# Altium PCB 606-100863-r02.pcbdoc (part 1 of 2)
Units mm, origin at the board's own origin, x right, y up, seen from the top; angles counter-clockwise.
Board outline 84 x 22 mm, 2 copper layers (Top Layer, Bottom Layer), stack 1.471 mm thick; 42 components, 21 nets, 119 pads, 46 vias.
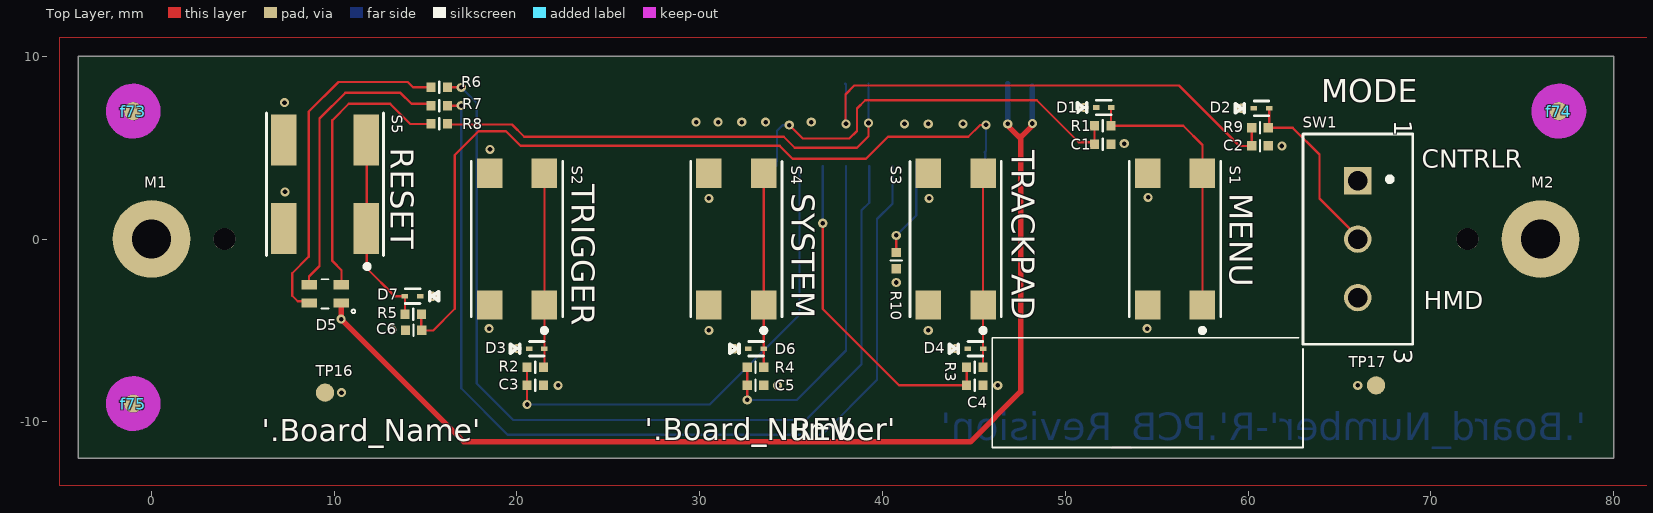
[diagram p0: Top Layer view]
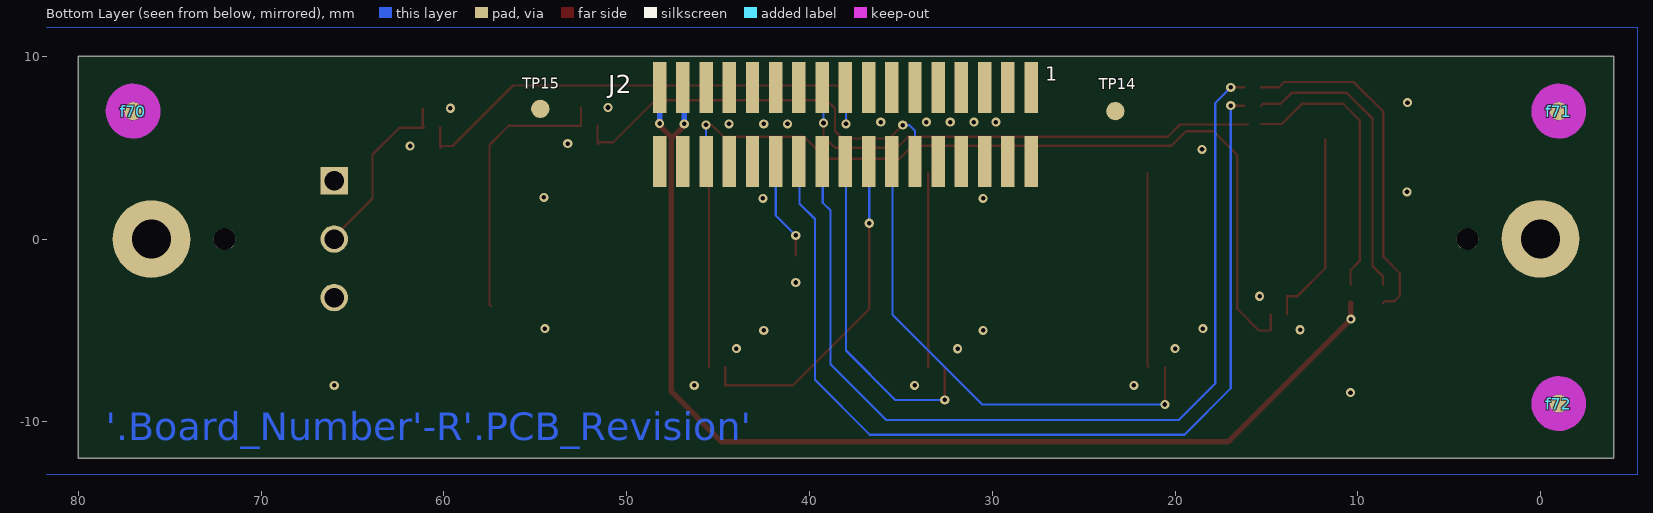
[diagram p1: Bottom Layer view, seen from below]

## Layer stack, top to bottom
Top Solder: solder mask 0.0102, Solder Resist, Dk 3.5
Top Layer: signal copper 0.0356
Dielectric 1: core 1.4, FR-4, Dk 4.2
Bottom Layer: signal copper 0.0356
Bottom Solder: solder mask 0.0102, Solder Resist, Dk 3.5

## Board outline
-4,-12 -4,10 80,10 80,-12

## Design rules (kind name [scope] priority, off if disabled: settings)
AssemblyTestPointUsage [All] p0: scope1count=1 scope1_0_kind=Board scope1_0_value=Board scope2count=1 scope2_0_kind=Board scope2_0_value=Board commentlength=0
AssemblyTestpoint [All] p0: scope1count=1 scope1_0_kind=Board scope1_0_value=Board scope2count=1 scope2_0_kind=Board scope2_0_value=Board commentlength=0
BoardOutlineClearance [All] p0: scope1count=1 scope1_0_kind=Board scope1_0_value=Board scope2count=1 scope2_0_kind=Board scope2_0_value=Board commentlength=0 gap=0.25
BoardOutlineClearance [All] p1: gap=0.25 except(0: Text-OutlineEdge)
Clearance [All] p0: scope1count=1 scope1_0_kind=Board scope1_0_value=Board scope2count=1 scope2_0_kind=Board scope2_0_value=Board commentlength=0 gap=0.125
Clearance [All] p1: gap=0.125
ComponentClearance [All] p0: scope1count=1 scope1_0_kind=Board scope1_0_value=Board scope2count=1 scope2_0_kind=Board scope2_0_value=Board commentlength=0 gap=0.18 collisioncheckmode=3
ComponentClearance [All] p1: gap=0.18 collisioncheckmode=3 verticalgap=0.18 showdistances=FALSE
DiffPairsRouting [All] p0: scope1count=1 scope1_0_kind=Board scope1_0_value=Board scope2count=1 scope2_0_kind=Board scope2_0_value=Board commentlength=0
FabricationTestPointUsage [All] p0: scope1count=1 scope1_0_kind=Board scope1_0_value=Board scope2count=1 scope2_0_kind=Board scope2_0_value=Board commentlength=0 valid=0 allowmultiple=FALSE
FabricationTestpoint [All] p0: scope1count=1 scope1_0_kind=Board scope1_0_value=Board scope2count=1 scope2_0_kind=Board scope2_0_value=Board commentlength=0 side=3 testpointundercomponent=TRUE minsize=1.016 maxsize=2.54 preferedsize=1.524 minholesize=0 maxholesize=1.016 preferedholesize=0.813 testpointgrid=0.025
FanoutControl Fanout_BGA [All] p0 off: scope1count=1 scope1_0_kind=Board scope1_0_value=Board scope2count=1 scope2_0_kind=Board scope2_0_value=Board commentlength=69 // Protel DXP Scope 1 Expression Was: IsBGA   Fanout_BGA (Default Rule)
FanoutControl Fanout_LCC [All] p0 off: scope1count=1 scope1_0_kind=Board scope1_0_value=Board scope2count=1 scope2_0_kind=Board scope2_0_value=Board commentlength=69 // Protel DXP Scope 1 Expression Was: IsLCC   Fanout_LCC (Default Rule)
FanoutControl Fanout_SOIC [All] p0 off: scope1count=1 scope1_0_kind=Board scope1_0_value=Board scope2count=1 scope2_0_kind=Board scope2_0_value=Board commentlength=71 // Protel DXP Scope 1 Expression Was: IsSOIC   Fanout_SOIC (Default Rule)
FanoutControl Fanout_Small [All] p0 off: scope1count=1 scope1_0_kind=Board scope1_0_value=Board scope2count=1 scope2_0_kind=Board scope2_0_value=Board commentlength=84 // Protel DXP Scope 1 Expression Was: (CompPinCount < 5)   Fanout_Small (Default Rule)
FanoutControl Fanout_Default [All] p0: scope1count=1 scope1_0_kind=Board scope1_0_value=Board scope2count=1 scope2_0_kind=Board scope2_0_value=Board commentlength=30 // Fanout_Default (Default Rule)
Height [All] p0: scope1count=1 scope1_0_kind=Board scope1_0_value=Board scope2count=1 scope2_0_kind=Board scope2_0_value=Board commentlength=0
HoleSize [All] p0: scope1count=1 scope1_0_kind=Board scope1_0_value=Board scope2count=1 scope2_0_kind=Board scope2_0_value=Board commentlength=0 absolutevalues=TRUE maxlimit=2.7 minlimit=0.025 maxpercent=80.000 minpercent=20.000
HoleSize [All] p1: absolutevalues=TRUE maxlimit=2.7 minlimit=0.025 maxpercent=80.000 minpercent=20.000
HoleToHoleClearance [All] p0: scope1count=1 scope1_0_kind=Board scope1_0_value=Board scope2count=1 scope2_0_kind=Board scope2_0_value=Board commentlength=0
LayerPairs [All] p0: scope1count=1 scope1_0_kind=Board scope1_0_value=Board scope2count=1 scope2_0_kind=Board scope2_0_value=Board commentlength=0 enforce=TRUE
MinimumSolderMaskSliver [All] p0: scope1count=1 scope1_0_kind=Board scope1_0_value=Board scope2count=1 scope2_0_kind=Board scope2_0_value=Board commentlength=0
MinimumSolderMaskSliver MinimumSolderMaskSliver_1 [All] p0 off: scope1count=1 scope1_0_kind=Board scope1_0_value=Board scope2count=1 scope2_0_kind=Board scope2_0_value=Board commentlength=44 // Protel DXP Scope 2 Expression Was: IsPad
MinimumSolderMaskSliver MinimumSolderMaskSliver_1 [isvia vs IsPad] p1: minsoldermaskwidth=0
MinimumSolderMaskSliver [All] p2: minsoldermaskwidth=0.05
NetAntennae [All] p0: scope1count=1 scope1_0_kind=Board scope1_0_value=Board scope2count=1 scope2_0_kind=Board scope2_0_value=Board commentlength=0
PasteMaskExpansion [All] p0: scope1count=1 scope1_0_kind=Board scope1_0_value=Board scope2count=1 scope2_0_kind=Board scope2_0_value=Board commentlength=0 expansion=0
PlaneClearance [All] p0: scope1count=1 scope1_0_kind=Board scope1_0_value=Board scope2count=1 scope2_0_kind=Board scope2_0_value=Board commentlength=0 clearance=0.2
PlaneClearance [All] p1: clearance=0.2
PlaneConnect [All] p0: scope1count=1 scope1_0_kind=Board scope1_0_value=Board scope2count=1 scope2_0_kind=Board scope2_0_value=Board commentlength=0 planeconnectstyle=Direct reliefexpansion=0.508 reliefentries=4 reliefconductorwidth=0.254 reliefairgap=0.254
PlaneConnect [All] p1: planeconnectstyle=Direct reliefexpansion=0.508 reliefentries=4 reliefconductorwidth=0.254 reliefairgap=0.254
PolygonConnect POLY_VIA [All] p0 off: scope1count=1 scope1_0_kind=Board scope1_0_value=Board scope2count=1 scope2_0_kind=Board scope2_0_value=Board commentlength=48 connectstyle=Direct reliefconductorwidth=0.254 reliefentries=4 polygonreliefangle="90 Angle" // Protel DXP Scope 2 Expression Was: IsPolygon
PolygonConnect MTG [All] p0: scope1count=1 scope1_0_kind=PadClass scope1_0_value=Thick_Thermal scope2count=1 scope2_0_kind=Board scope2_0_value=Board commentlength=0 connectstyle=Relief reliefconductorwidth=0.4 reliefentries=4 polygonreliefangle="90 Angle"
PolygonConnect PolygonConnect_1 [All] p0: scope1count=1 scope1_0_kind=Board scope1_0_value=Board scope2count=1 scope2_0_kind=Board scope2_0_value=Board commentlength=0 connectstyle=Relief reliefconductorwidth=0.25 reliefentries=4 polygonreliefangle="90 Angle"
PolygonConnect MTG [InPadClass('Thick_Thermal')] p1: connectstyle=Relief reliefconductorwidth=0.4 reliefentries=4 polygonreliefangle="90 Angle" airgapwidth=0.125
PolygonConnect POLY_VIA [IsVia vs IsPolygon] p2: connectstyle=Direct reliefconductorwidth=0.254 reliefentries=4 polygonreliefangle="90 Angle" airgapwidth=0.254
PolygonConnect PolygonConnect_1 [All] p3: connectstyle=Relief reliefconductorwidth=0.25 reliefentries=4 polygonreliefangle="90 Angle" airgapwidth=0.125
RoomDefinition HMD_Button [All] p0: scope1count=1 scope1_0_kind=ComponentClass scope1_0_value=HMD_Button scope2count=1 scope2_0_kind=Board scope2_0_value=Board commentlength=0 region_x1=152558709 region_y1=56930451 region_x2=185439112 region_y2=65590417 confinementstyle=ConfineIn
RoomDefinition HMD_Button [InComponentClass('HMD_Button')] p1: confinementstyle=ConfineIn formatcopy=TRUE lockcomponents=FALSE outline -3.835,-12.067 79.681,-12.067 79.681,9.929 -3.835,9.929
RoutingCorners [All] p0: scope1count=1 scope1_0_kind=Board scope1_0_value=Board scope2count=1 scope2_0_kind=Board scope2_0_value=Board commentlength=0 cornerstyle=45-Degree minsetback=2.54 maxsetback=2.54
RoutingLayers [All] p0: scope1count=1 scope1_0_kind=Board scope1_0_value=Board scope2count=1 scope2_0_kind=Board scope2_0_value=Board commentlength=0 top layer=Automatic bottom layer=Automatic
RoutingPriority [All] p0: scope1count=1 scope1_0_kind=Board scope1_0_value=Board scope2count=1 scope2_0_kind=Board scope2_0_value=Board commentlength=0
RoutingTopology [All] p0: scope1count=1 scope1_0_kind=Board scope1_0_value=Board scope2count=1 scope2_0_kind=Board scope2_0_value=Board commentlength=0 topology=Shortest
RoutingVias [All] p0: scope1count=1 scope1_0_kind=Board scope1_0_value=Board scope2count=1 scope2_0_kind=Board scope2_0_value=Board commentlength=0 holewidth=0.25 width=0.5 viastyle="Through Hole" minholewidth=0.25 minwidth=0.5 maxholewidth=0.25 maxwidth=0.5
RoutingVias [All] p1: holewidth=0.25 width=0.5 viastyle="Through Hole" minholewidth=0.25 minwidth=0.5 maxholewidth=0.25 maxwidth=0.5
ShortCircuit [All] p0: scope1count=1 scope1_0_kind=Board scope1_0_value=Board scope2count=1 scope2_0_kind=Board scope2_0_value=Board commentlength=0 allowed=FALSE
SilkToBoardRegionClearance [All] p0: scope1count=1 scope1_0_kind=Board scope1_0_value=Board scope2count=1 scope2_0_kind=Board scope2_0_value=Board commentlength=0
SilkToSilkClearance [All] p0 off: scope1count=1 scope1_0_kind=Board scope1_0_value=Board scope2count=1 scope2_0_kind=Board scope2_0_value=Board commentlength=0
SilkToSilkClearance [All] p1 off: silktosilkclearance=0.05
SilkToSolderMaskClearance [All] p0 off: scope1count=1 scope1_0_kind=Board scope1_0_value=Board scope2count=1 scope2_0_kind=Board scope2_0_value=Board commentlength=44 // Protel DXP Scope 1 Expression Was: IsPad
SilkToSolderMaskClearance [IsPad] p1: minsilkscreentomaskgap=0.125 clearancetoexposedcopper=TRUE
SolderMaskExpansion [All] p0: scope1count=1 scope1_0_kind=Board scope1_0_value=Board scope2count=1 scope2_0_kind=Board scope2_0_value=Board commentlength=0 expansion=0.05
SolderMaskExpansion [All] p1: expansion=0.05
UnRoutedNet [All] p0: scope1count=1 scope1_0_kind=Board scope1_0_value=Board scope2count=1 scope2_0_kind=Board scope2_0_value=Board commentlength=0
UnpouredPolygon [All] p0: scope1count=1 scope1_0_kind=Board scope1_0_value=Board scope2count=1 scope2_0_kind=Board scope2_0_value=Board commentlength=0
Width [All] p0: scope1count=1 scope1_0_kind=Board scope1_0_value=Board scope2count=1 scope2_0_kind=Board scope2_0_value=Board commentlength=0 maxlimit=0.5 minlimit=0.125 preferedwidth=0.125
Width PWR_GND [All] p0: scope1count=1 scope1_0_kind=NetClass scope1_0_value=PWR_GND scope2count=1 scope2_0_kind=Board scope2_0_value=Board commentlength=0 maxlimit=0.25 minlimit=0.25 preferedwidth=0.25
Width CRITICAL [All] p0: scope1count=1 scope1_0_kind=NetClass scope1_0_value=MOTOR_DRIVERS scope2count=1 scope2_0_kind=Board scope2_0_value=Board commentlength=0 maxlimit=0.4 minlimit=0.3 preferedwidth=0.4
Width PWR_GND [InNetClass('PWR_GND')] p1: maxlimit=0.25 minlimit=0.25 preferedwidth=0.25
Width CRITICAL [InNetClass('MOTOR_DRIVERS')] p2: maxlimit=0.4 minlimit=0.3 preferedwidth=0.4
Width [All] p3: maxlimit=0.5 minlimit=0.125 preferedwidth=0.125
23 further rules are at their usual default settings.

## Classes and differential pairs
pad class Thick_Thermal: M1-1 M2-1 SW1-1
component class HMD_Button: C1 C2 C3 C4 C5 C6 D1 D2 D3 D4 D5 D6 D7 J2 M1 M2 R1 R2 R3 R4 R5 R6 R7 R8 R9 R10 S1 S2 S3 S4 S5 SW1 TP14 TP15 TP16 TP17
net class PWR_GND: GND

## Components (designator, comment, footprint, x,y, rotation, side; value= is the part's Value field where it differs from the comment)
C1 "0.1uF" 0402-IPCsm_55 52.05,5.2 r0 top
C2 "0.1uF" 0402-IPCsm_55 60.65,5.095 r0 top
C3 "0.1uF" 0402-IPCsm_55 21,-8 r0 top
C4 "0.1uF" 0402-IPCsm_55 45.05,-8 r0 top
C5 "0.1uF" 0402-IPCsm_55 33.05,-8 r0 top
C6 "0.1uF" 0402-IPCsm_55 14.343,-4.995 r180 top
D1 "ESD9R3.3ST5G" sod923-40 52.1,7.2 r180 top
D2 "ESD9R3.3ST5G" sod923-40 60.73,7.15 r180 top
D3 "ESD9R3.3ST5G" sod923-40 21.08,-6 r180 top
D4 "ESD9R3.3ST5G" sod923-40 45.08,-6 r180 top
D5 "APTF1616SEEZGQBDC" led_RBG_1p6x1p6_sm 9.5,-3 r0 top locked
D6 "ESD9R3.3ST5G" sod923-40 33.08,-6 r180 top
D7 "ESD9R3.3ST5G" sod923-40 14.288,-3.12 r0 top
f70 "Comment" Fiducial_c100opening300 77,7 r180 bottom
f71 "Comment" Fiducial_c100opening300 -1,7 r180 bottom
f72 "Comment" Fiducial_c100opening300 -1,-9 r180 bottom
f73 "Comment" Fiducial_c100opening300 -1,7 r0 top
f74 "Comment" Fiducial_c100opening300 77,7 r0 top
f75 "Comment" Fiducial_c100opening300 -1,-9 r0 top
J2 "FTSH-117-01-F-DV-K" FTSH-117-01-XXX-DV-K 38.035,6.268 r0 bottom
M1 "MTGC425H215P" MTGC425H215P 0,0 r0 top
M2 "MTGC425H215P" MTGC425H215P 75.993,-0.011 r0 top
R1 "100" 0402-IPCsm_40 52.05,6.2 r0 top
R2 "100" 0402-IPCsm_40 21,-7 r0 top
R3 "100" 0402-IPCsm_40 45.05,-7 r0 top
R4 "100" 0402-IPCsm_40 33.05,-7 r0 top
R5 "100" 0402-IPCsm_40 14.318,-4.12 r180 top
R6 "240" 0402-IPCsm_40 15.75,8.3 r180 top
R7 "124" 0402-IPCsm_40 15.75,7.3 r180 top
R8 "124" 0402-IPCsm_40 15.75,6.3 r180 top
R9 "100" 0402-IPCsm_40 60.65,6.095 r0 top
R10 "0" 0402-IPCsm_40 40.75,-1.175 r90 top
S1 "TL3305AF260QG" SW_TL3305_G 56,0 r90 top
S2 "TL3305AF260QG" SW_TL3305_G 20,0 r90 top
S3 "TL3305AF260QG" SW_TL3305_G 44,0 r90 top
S4 "TL3305AF260QG" SW_TL3305_G 32,0 r90 top
S5 "TL3301EF160QJ" SW_TL3301_J 9.5,3 r90 top
SW1 "1825115-1" SW_3_TE_1825115 66,0 r270 top
TP14 "tp-1mm" TP-S100_SMT 23.263,7 r90 bottom
TP15 "tp-1mm" TP-S100_SMT 54.725,7.125 r90 bottom
TP16 "tp-1mm" TP-S100_SMT 9.5,-8.4 r90 top
TP17 "tp-1mm" TP-S100_SMT 67,-8 r90 top

## Footprints (in the part's own frame and the unit in brackets; to place one, negate y for a bottom-side part, rotate by r counter-clockwise, add the part's x,y. Pads: shape width x height; smd on the part's side, far side on the other; paste and mask are expansions set on the pad)
0402-IPCsm_40 [mm] "0402-IPCSM_40"
  rect 0.5x0.52 smd mask+0: 1(-0.45,0) 2(0.45,0)
  silkscreen extent 0,-0.3 0,0.3
0402-IPCsm_55 [mm] "0402-IPCSM_55"
  rect 0.5x0.52 smd mask+0: 1(-0.45,0) 2(0.45,0)
  silkscreen extent 0,-0.3 0,0.3
Fiducial_c100opening300 [mm]
  round 1 smd paste-10 mask+0: 0(0,0)
  Top Layer keep-out circle w1: c0,0 r1
FTSH-117-01-XXX-DV-K [mil]
  rect 29x110 smd mask+0: 1(-400,-80) 2(-400,80) 3(-350,-80) 4(-350,80) 5(-300,-80) 6(-300,80) 7(-250,-80) 8(-250,80) 9(-200,-80) 10(-200,80) 11(-150,-80) 12(-150,80) 13(-100,-80) 14(-100,80) 15(-50,-80) 16(-50,80) 17(0,-80) 18(0,80) 19(50,-80) 20(50,80) 21(100,-80) 22(100,80) 23(150,-80) 24(150,80) 25(200,-80) 26(200,80) 27(250,-80) 28(250,80) 29(300,-80) 30(300,80) 31(350,-80) 32(350,80) 33(400,-80) 34(400,80)
led_RBG_1p6x1p6_sm [mm] "led_RBG_1p6x1p6_sm"
  rect 0.85x0.5 smd: 1(0.875,-0.5) 2(-0.875,-0.5) 3(-0.875,0.5) 4(0.875,0.5)
  silkscreen extent -0.2,-1.05 1.65,0.8
MTGC425H215P [mm] "MTGC425H215P"
  round 4.25 hole 2.15: 1(0.007,0.011)
sod923-40 [mm] "SOD923 .4mm High"
  rect 0.36x0.25 smd mask+0: A(0.42,0) C(-0.42,0)
  silkscreen extent -0.4,-0.4 1.44,0.4
SW_3_TE_1825115 [mm] "SWITCH SLIDE SPDT 250MA 125V"
  rect 1.5x1.5 hole 1.07: 1(-3.2,0)
  round 1.5 hole 1.07: 2(0,0) 3(3.2,0)
  silkscreen extent -5.75,-3 5.75,3
SW_TL3301_J [mm] "SWITCH TACTILE SPST-NO 0.05A 12V"
  rect 2.795x1.4 smd mask+0: 1(-2.412,-2.25) 2(2.412,-2.25) 3(-2.412,2.25) 4(2.412,2.25)
  silkscreen extent -4.62,-3.2 3.9,3.2
SW_TL3305_G [mm] "SWITCH TACTILE SPST-NO 50MA 12V"
  rect 1.6x1.4 smd mask+0: 1(-3.6,-1.5) 2(3.6,-1.5) 3(-3.6,1.5) 4(3.6,1.5)
  silkscreen extent -5.12,-2.5 4.25,2.5
TP-S100_SMT [mm] "TP-S100_SMT"
  round 1 smd paste-0.5: 1(0,0)

## Part data
C1 C2 C3 C4 C5 C6: library part GRM155R71C104KA88D, "CAP CER .1UF 16V X7R 0402"
D1 D2 D3 D4 D6 D7: "TVS DIODE 3.3VWM 7.8VC SOD923"
D5: "LED RGB CLEAR 0606 SMD"
J2: library part FTSH-117-01-f-DV-k, "34 Positions Header, Shrouded Connector 0.050\" (1.27mm) Surface Mount Gold"
M1 M2: "MTG, 4.25mm PAD, 2.15mm Plated Hole"
R1 R2 R3 R4 R5 R9: library part MCR01MZPJ101, "RES 100 OHM 5% 0402 SMD"
R6: library part ERJ-2RKF2400X, "RES 240 OHM 1/10W 1% 0402 SMD"
R7 R8: library part RC0402FR-07124RL, "RES SMD 124 OHM 1% 1/16W 0402"
R10: library part ERJ-2GE0R00X, "RES 0.0 OHM 1/10W JUMP 0402 SMD"
S1 S2 S3 S4: "SWITCH TACTILE SPST-NO 50MA 12V"
S5: "SWITCH TACTILE SPST-NO 0.05A 12V"
SW1: "SWITCH SLIDE SPDT 250MA 125V"
TP14 TP15 TP16 TP17: library part TP0042, "TESTPOINT, 1MM SMD, Square pad, Round SM opening"

## Free pads (board coordinates)
  round 1.2 hole 1.2 unplated: 0(4,0) 0(72,0)

## Via types
v1: diameter 0.5, hole 0.25, Top Layer to Bottom Layer, tented both sides, 46 vias

## Nets (pads, with @x,y where several pads share a name; then routed paths per layer and width w, separated by ;. In a path a pad name is that pad's centre, name@x,y a point inside that pad or via, vN(x,y) a via of type N, cw(c..) or ccw(c..) an arc to the next point about the centre after c; other vN are vias at no path point)
BTN_MENU: C1.1 J2.12 R1.1 | length 23.3
  Top Layer w0.125: v1(34.893,6.236) 35.63,5.5 38.18,5.5 38.6,5.92 38.6,7.15 39.05,7.6 48.43,7.6 50.73,5.3 51.5,5.3 C1.1@51.6,5.2 R1.1@51.6,6.2
  Bottom Layer w0.125: J2.12@34.19,4 J2.12@34.19,4.261 ; J2.12@34.224,4.261 34.224,5.924 34.536,6.236 v1(34.893,6.236)
BTN_SYS: C5.1 J2.18 R4.1 | length 18.4
  Top Layer w0.125: v1(32.6,-8.8) C5.1@32.6,-8 R4.1@32.6,-7
  Bottom Layer w0.125: v1(32.6,-8.8) 35.3,-8.8 38,-6.1 J2.18@38,4
BTN_TRACK: C4.1 J2.16 R3.1 | length 18.4
  Top Layer w0.125: v1(36.73,0.87) 36.73,-3.83 40.9,-8 C4.1@44.6,-8 R3.1@44.6,-7
  Bottom Layer w0.125: v1(36.73,0.87) J2.16@36.73,4
BTN_TRIG: C3.1 J2.14 R2.1 | length 27.1
  Top Layer w0.125: v1(20.55,-9.05) C3.1@20.55,-8 R2.1@20.55,-7
  Bottom Layer w0.125: v1(20.55,-9.05) 30.55,-9.05 35.46,-4.14 J2.14@35.46,4
GND: C1.2 C2.2 C3.2 C4.2 C5.2 C6.2 D1.A D2.A D3.A D4.A D6.A D7.A J2.3 J2.5 J2.7 J2.9 J2.11 J2.13 J2.15 J2.21 J2.23 J2.25 J2.29 M1.1 M2.1 R10.1 S1.3 S1.4 S2.3 S2.4 S3.3 S3.4 S4.3 S4.4 S5.3 S5.4 SW1.1 TP14.1 TP15.1 TP16.1 TP17.1
  other v1: 10.4,-8.4 22.25,-8 34.25,-8 46.3,-8 66,-8 19.995,-5.995 31.89,-6 43.995,-5.995 30.5,-4.995 42.5,-4.995 13.159,-4.96 18.475,-4.9 54.475,-4.9 15.373,-3.125 40.75,-2.375 30.5,2.23 42.55,2.23 54.525,2.28 7.306,2.58 18.525,4.905 61.845,5.095 53.225,5.225 41.2,6.3 42.5,6.3 44.4,6.3 29.8,6.4 31,6.4 32.3,6.4 33.6,6.4 36.1,6.4 59.645,7.155 51.02,7.2 7.281,7.469
MASTER_NRST: C6.1 J2.30 R5.1 | length 44.9
  Top Layer w0.125: R5.1@14.768,-4.12 14.768,-4.97 C6.1@14.793,-4.995 15.422,-4.995 16.6,-3.817 16.6,4.6 17.9,5.9 19.4,5.9 20.2,5.1 34.371,5.1 35.071,4.4 39.1,4.4 40.3,5.6 44.694,5.6 45.339,6.245 v1(45.661,6.245)
  Bottom Layer w0.125: J2.30@45.58,4.75 45.661,4.831 v1(45.661,6.245) ; J2.30@45.62,4 J2.30@45.62,4.75
MCU_LED_B: J2.19 R8.1 | length 26.9
  Top Layer w0.125: R8.1@16.021,6.275 R8.1@16.2,6.275 ; R8.1@16.2,6.3 R8.1@16.2,6.275 ; v1(39.23,6.35) 39.23,5.63 38.6,5 35.2,5 34.6,5.6 20.4,5.6 19.725,6.275 R8.1@16.2,6.275
  Bottom Layer w0.125: v1(39.23,6.35) J2.19@39.23,8.5
MCU_LED_G: J2.22 R7.1 | length 53.4
  Top Layer w0.125: R7.1@16.2,7.3 v1(16.95,7.3) v1@17.08,7.3
  Bottom Layer w0.125: v1(16.95,7.3) 16.95,-8.166 19.484,-10.7 36.7,-10.7 39.7,-7.7 39.7,1.1 40.54,1.94 J2.22@40.54,4
MCU_LED_R: J2.20 R6.1 | length 51.6
  Top Layer w0.125: R6.1@16.2,8.3 v1(16.95,8.3) v1@17.08,8.3
  Bottom Layer w0.125: v1(16.95,8.3) 17.8,7.45 17.8,-7.9 19.8,-9.9 35.8,-9.9 38.85,-6.85 38.85,1.575 39.27,1.995 J2.20@39.27,4
NCONTR_MODE: C2.1 J2.17 R9.1 | length 28.8
  Top Layer w0.125: v1(38,6.3) 37.97,6.33 37.97,7.915 38.455,8.4 56.225,8.4 59.53,5.095 C2.1@60.105,5.095 ; C2.1@60.2,5 C2.1@60.105,5.095 ; R9.1@60.2,6.095 C2.1@60.2,5.095 C2.1@60.105,5.095
  Bottom Layer w0.125: J2.17@37.96,8.5 38,8.46 v1(38,6.3)
NetD1_C: D1.C R1.2 S1.1 S1.2 | length 15.3
  Top Layer w0.125: D1.C@52.52,7.2 52.5,7.18 R1.2@52.5,6.2 56.45,6.2 57.5,5.15 S1.2@57.5,3.6 S1.1@57.5,-3.6 S1.1@57.42,-3.68
NetD2_C: D2.C R9.2 SW1.2 | length 10.4
  Top Layer w0.125: D2.C@61.15,7.15 61.15,6.145 R9.2@61.1,6.095 62.434,6.095 63.9,4.63 63.9,2.225 66.125,0 SW1.2@66.5,0
NetD3_C: D3.C R2.2 S2.1 S2.2 | length 10.6
  Top Layer w0.125: R2.2@21.45,-7 21.5,-6.95 D3.C@21.5,-6 S2.1@21.5,-3.6 S2.2@21.5,3.6
NetD4_C: D4.C R3.2 S3.1 S3.2 | length 10.6
  Top Layer w0.125: R3.2@45.5,-7 D4.C@45.5,-6 S3.1@45.5,-3.6 S3.2@45.5,3.6
NetD5_2: D5.2 R6.2 | length 19
  Top Layer w0.125: D5.2@8.625,-3.5 8.525,-3.4 8,-3.4 7.7,-3.1 7.7,-1.87 8.6,-0.97 8.6,6.97 10.23,8.6 14.03,8.6 14.33,8.3 R6.2@15.3,8.3
NetD5_3: D5.3 R7.2 | length 16.3
  Top Layer w0.125: D5.3@8.625,-2.5 8.625,-2.045 9.2,-1.47 9.2,6.6 10.6,8 13.63,8 14.23,7.4 15.2,7.4 R7.2@15.3,7.3
NetD5_4: D5.4 R8.2 | length 15.4
  Top Layer w0.125: D5.4@10.375,-2.5 10.4,-2.475 10.4,-1.7 9.9,-1.2 9.9,6.5 10.8,7.4 13.059,7.4 14.159,6.3 R8.2@15.3,6.3
NetD6_C: D6.C R4.2 S4.1 S4.2 | length 10.6
  Top Layer w0.125: R4.2@33.5,-7 D6.C@33.5,-6 S4.1@33.5,-3.6 S4.2@33.5,3.6
NetD7_C: D7.C R5.2 S5.1 S5.2 | length 10.7
  Top Layer w0.125: S5.2@11.781,5.433 11.781,-1.601 13.3,-3.12 D7.C@13.868,-3.12 R5.2@13.868,-4.12
NetJ2_24: J2.24 R10.2 | length 5.6
  Top Layer w0.125: R10.2@40.75,-0.9 R10.2@40.75,-0.725 v1(40.75,0.2)
  Bottom Layer w0.125: v1(40.75,0.2) 41.845,1.295 J2.24@41.845,4.236
VCC_3V3_APP: D5.1 J2.31 J2.33 | length 62.3
  Top Layer w0.3: D5.1@10.375,-3.5 v1(10.375,-4.375) 17.1,-11.1 44.8,-11.1 47.55,-8.35 47.55,5.568 ; v1(46.85,6.3) 46.85,6.2 47.516,5.534 47.55,5.568 ; 47.55,5.618 47.55,5.568 ; v1(48.2,6.325) 48.2,6.218 47.55,5.568
  Bottom Layer w0.3: v1(46.85,6.3) J2.31@46.85,8.5 ; v1(48.2,6.325) J2.33@48.2,8.37
pads on no net: f70.0 f71.0 f72.0 f73.0 f74.0 f75.0 J2.1 J2.2 J2.4 J2.6 J2.8 J2.10 J2.26 J2.27 J2.28 J2.32 J2.34 SW1.3

## Polygon pours and split planes (outlines as drawn)
no net on FAB_DWG (solid): -237.468,17.483 ccw(c-237.968,17.483) -237.968,17.983 ccw(c-237.968,17.483) -238.468,17.483 ccw(c-237.968,17.483) -237.968,16.983 ccw(c-237.968,17.483) -237.468,17.483
no net on FAB_DWG (solid): -237.468,-6.517 ccw(c-237.968,-6.517) -237.968,-6.017 ccw(c-237.968,-6.517) -238.468,-6.517 ccw(c-237.968,-6.517) -237.968,-7.017 ccw(c-237.968,-6.517) -237.468,-6.517
no net on FAB_DWG (solid): -241.468,17.483 ccw(c-241.968,17.483) -241.968,17.983 ccw(c-241.968,17.483) -242.468,17.483 ccw(c-241.968,17.483) -241.968,16.983 ccw(c-241.968,17.483) -241.468,17.483
no net on FAB_DWG (solid): -243.468,17.483 ccw(c-243.968,17.483) -243.968,17.983 ccw(c-243.968,17.483) -244.468,17.483 ccw(c-243.968,17.483) -243.968,16.983 ccw(c-243.968,17.483) -243.468,17.483
no net on FAB_DWG (solid): -245.468,17.483 ccw(c-245.968,17.483) -245.968,17.983 ccw(c-245.968,17.483) -246.468,17.483 ccw(c-245.968,17.483) -245.968,16.983 ccw(c-245.968,17.483) -245.468,17.483
no net on FAB_DWG (solid): -239.468,17.483 ccw(c-239.968,17.483) -239.968,17.983 ccw(c-239.968,17.483) -240.468,17.483 ccw(c-239.968,17.483) -239.968,16.983 ccw(c-239.968,17.483) -239.468,17.483
no net on FAB_DWG (solid): -241.468,-6.517 ccw(c-241.968,-6.517) -241.968,-6.017 ccw(c-241.968,-6.517) -242.468,-6.517 ccw(c-241.968,-6.517) -241.968,-7.017 ccw(c-241.968,-6.517) -241.468,-6.517
no net on FAB_DWG (solid): -243.468,-6.517 ccw(c-243.968,-6.517) -243.968,-6.017 ccw(c-243.968,-6.517) -244.468,-6.517 ccw(c-243.968,-6.517) -243.968,-7.017 ccw(c-243.968,-6.517) -243.468,-6.517
no net on FAB_DWG (solid): -245.468,-6.517 ccw(c-245.968,-6.517) -245.968,-6.017 ccw(c-245.968,-6.517) -246.468,-6.517 ccw(c-245.968,-6.517) -245.968,-7.017 ccw(c-245.968,-6.517) -245.468,-6.517
no net on FAB_DWG (solid): -239.468,-6.517 ccw(c-239.968,-6.517) -239.968,-6.017 ccw(c-239.968,-6.517) -240.468,-6.517 ccw(c-239.968,-6.517) -239.968,-7.017 ccw(c-239.968,-6.517) -239.468,-6.517
no net on FAB_DWG (solid): -249.468,17.483 ccw(c-249.968,17.483) -249.968,17.983 ccw(c-249.968,17.483) -250.468,17.483 ccw(c-249.968,17.483) -249.968,16.983 ccw(c-249.968,17.483) -249.468,17.483
no net on FAB_DWG (solid): -247.468,17.483 ccw(c-247.968,17.483) -247.968,17.983 ccw(c-247.968,17.483) -248.468,17.483 ccw(c-247.968,17.483) -247.968,16.983 ccw(c-247.968,17.483) -247.468,17.483
no net on FAB_DWG (solid): -253.468,17.483 ccw(c-253.968,17.483) -253.968,17.983 ccw(c-253.968,17.483) -254.468,17.483 ccw(c-253.968,17.483) -253.968,16.983 ccw(c-253.968,17.483) -253.468,17.483
no net on FAB_DWG (solid): -251.468,17.483 ccw(c-251.968,17.483) -251.968,17.983 ccw(c-251.968,17.483) -252.468,17.483 ccw(c-251.968,17.483) -251.968,16.983 ccw(c-251.968,17.483) -251.468,17.483
no net on FAB_DWG (solid): -249.468,-6.517 ccw(c-249.968,-6.517) -249.968,-6.017 ccw(c-249.968,-6.517) -250.468,-6.517 ccw(c-249.968,-6.517) -249.968,-7.017 ccw(c-249.968,-6.517) -249.468,-6.517
no net on FAB_DWG (solid): -247.468,-6.517 ccw(c-247.968,-6.517) -247.968,-6.017 ccw(c-247.968,-6.517) -248.468,-6.517 ccw(c-247.968,-6.517) -247.968,-7.017 ccw(c-247.968,-6.517) -247.468,-6.517
no net on FAB_DWG (solid): -251.468,-6.517 ccw(c-251.968,-6.517) -251.968,-6.017 ccw(c-251.968,-6.517) -252.468,-6.517 ccw(c-251.968,-6.517) -251.968,-7.017 ccw(c-251.968,-6.517) -251.468,-6.517
no net on FAB_DWG (solid): -253.468,-6.517 ccw(c-253.968,-6.517) -253.968,-6.017 ccw(c-253.968,-6.517) -254.468,-6.517 ccw(c-253.968,-6.517) -253.968,-7.017 ccw(c-253.968,-6.517) -253.468,-6.517
no net on FAB_DWG (solid): -255.468,17.483 ccw(c-255.968,17.483) -255.968,17.983 ccw(c-255.968,17.483) -256.468,17.483 ccw(c-255.968,17.483) -255.968,16.983 ccw(c-255.968,17.483) -255.468,17.483
no net on FAB_DWG (solid): -257.468,17.483 ccw(c-257.968,17.483) -257.968,17.983 ccw(c-257.968,17.483) -258.468,17.483 ccw(c-257.968,17.483) -257.968,16.983 ccw(c-257.968,17.483) -257.468,17.483
no net on FAB_DWG (solid): -261.468,17.483 ccw(c-261.968,17.483) -261.968,17.983 ccw(c-261.968,17.483) -262.468,17.483 ccw(c-261.968,17.483) -261.968,16.983 ccw(c-261.968,17.483) -261.468,17.483
no net on FAB_DWG (solid): -259.468,17.483 ccw(c-259.968,17.483) -259.968,17.983 ccw(c-259.968,17.483) -260.468,17.483 ccw(c-259.968,17.483) -259.968,16.983 ccw(c-259.968,17.483) -259.468,17.483
no net on FAB_DWG (solid): -255.468,-6.517 ccw(c-255.968,-6.517) -255.968,-6.017 ccw(c-255.968,-6.517) -256.468,-6.517 ccw(c-255.968,-6.517) -255.968,-7.017 ccw(c-255.968,-6.517) -255.468,-6.517
no net on FAB_DWG (solid): -257.468,-6.517 ccw(c-257.968,-6.517) -257.968,-6.017 ccw(c-257.968,-6.517) -258.468,-6.517 ccw(c-257.968,-6.517) -257.968,-7.017 ccw(c-257.968,-6.517) -257.468,-6.517
no net on FAB_DWG (solid): -259.468,-6.517 ccw(c-259.968,-6.517) -259.968,-6.017 ccw(c-259.968,-6.517) -260.468,-6.517 ccw(c-259.968,-6.517) -259.968,-7.017 ccw(c-259.968,-6.517) -259.468,-6.517
no net on FAB_DWG (solid): -261.468,-6.517 ccw(c-261.968,-6.517) -261.968,-6.017 ccw(c-261.968,-6.517) -262.468,-6.517 ccw(c-261.968,-6.517) -261.968,-7.017 ccw(c-261.968,-6.517) -261.468,-6.517
no net on FAB_DWG (solid): -263.468,17.483 ccw(c-263.968,17.483) -263.968,17.983 ccw(c-263.968,17.483) -264.468,17.483 ccw(c-263.968,17.483) -263.968,16.983 ccw(c-263.968,17.483) -263.468,17.483
no net on FAB_DWG (solid): -265.468,17.483 ccw(c-265.968,17.483) -265.968,17.983 ccw(c-265.968,17.483) -266.468,17.483 ccw(c-265.968,17.483) -265.968,16.983 ccw(c-265.968,17.483) -265.468,17.483
no net on FAB_DWG (solid): -268.068,8.983 -267.568,10.483 -236.368,10.483 -235.868,8.983 -268.068,8.983
no net on FAB_DWG (solid): -235.868,1.983 -236.368,0.483 -267.568,0.483 -268.068,1.983 -235.868,1.983
no net on FAB_DWG (solid): -263.468,-6.517 ccw(c-263.968,-6.517) -263.968,-6.017 ccw(c-263.968,-6.517) -264.468,-6.517 ccw(c-263.968,-6.517) -263.968,-7.017 ccw(c-263.968,-6.517) -263.468,-6.517
no net on FAB_DWG (solid): -265.468,-6.517 ccw(c-265.968,-6.517) -265.968,-6.017 ccw(c-265.968,-6.517) -266.468,-6.517 ccw(c-265.968,-6.517) -265.968,-7.017 ccw(c-265.968,-6.517) -265.468,-6.517
no net on FAB_DWG (solid): -322.968,16.983 -323.968,20.983 -322.968,20.483 -321.968,20.983 -322.968,16.983
no net on FAB_DWG (solid): -322.968,-7.017 -321.968,-11.017 -322.968,-10.517 -323.968,-11.017 -322.968,-7.017
no net on FAB_DWG (solid): 1029 vertices, not listed, extent 278.324,-78.37 419.37,-64.796
no net on FAB_DWG (solid): 89 vertices, not listed, extent 318.543,-68.562 324.963,-64.798
no net on FAB_DWG (solid): 74 vertices, not listed, extent 330.213,-71.533 337.606,-64.798
no net on FAB_DWG (solid): 83 vertices, not listed, extent 343.995,-70.299 348.9,-65.711
no net on FAB_DWG (solid): 82 vertices, not listed, extent 355.608,-68.943 361.953,-65.715
no net on ASY_DWG (solid): 1029 vertices, not listed, extent 278.324,-78.37 419.37,-64.796
no net on ASY_DWG (solid): 89 vertices, not listed, extent 318.543,-68.562 324.963,-64.798
no net on ASY_DWG (solid): 74 vertices, not listed, extent 330.213,-71.533 337.606,-64.798
no net on ASY_DWG (solid): 83 vertices, not listed, extent 343.995,-70.299 348.9,-65.711
no net on ASY_DWG (solid): 82 vertices, not listed, extent 355.608,-68.943 361.953,-65.715
no net on ASY_DWG_R (solid): 1029 vertices, not listed, extent -351.63,-78.37 -210.584,-64.796
no net on ASY_DWG_R (solid): 89 vertices, not listed, extent -257.223,-68.562 -250.804,-64.798
no net on ASY_DWG_R (solid): 74 vertices, not listed, extent -269.866,-71.533 -262.474,-64.798
no net on ASY_DWG_R (solid): 83 vertices, not listed, extent -281.161,-70.299 -276.256,-65.711
no net on ASY_DWG_R (solid): 82 vertices, not listed, extent -294.213,-68.943 -287.868,-65.715
no net on TITLEBLOCK (solid): 331 vertices, not listed, extent -29.655,-51.37 29.05,-44.75
no net on TITLEBLOCK (solid): -7.718,-44.97 -5.18,-47.288 -5.18,-44.97 -7.718,-44.97
no net on TITLEBLOCK (solid): -12.905,-44.97 -11.782,-46.179 -10.703,-44.97 -12.905,-44.97
no net on TITLEBLOCK (solid): -2.42,-46.87 -1.43,-45.07 -0.53,-46.87 -2.42,-46.87
no net on TITLEBLOCK (solid): 26 vertices, not listed, extent 2.42,-46.27 5.12,-44.97
GND on Bottom Layer "GND_L02_P000" (solid, pour order 0): -5.3,11.6 -5.3,-12.9 81.8,-12.9 81.9,-13 82,-12.9 82,11.6 -5.3,11.6
GND on Top Layer "GND_L01_P002" (solid, pour order 2): -5.05,11.025 -5.05,-13.475 82.05,-13.475 82.15,-13.575 82.25,-13.475 82.25,11.025 -5.05,11.025

## Other copper
Top Layer:
  text ".Layer_Name" at -1.053,-70 h3.5
Bottom Layer:
  text "'.Board_Number'-R'.PCB_Revision'" at 78.5,-11 h1.52
  text ".Layer_Name" at -5.544,-70 h3.5

## Silkscreen, mask and mechanical layers (free items; w line width, h text height)
Top Overlay:
  lines w0.1: 62.75,-5.4 46,-5.4 46,-11.4 63,-11.4 63,-6
  text "MODE" at 64,7.5 h1.25
  text "RESET" at 13.1,5 h1.25 r270
  text "TRACKPAD" at 47.075,4.85 h1.25 r270
  text "CNTRLR" at 69.5,3.9 h1
  text "TRIGGER" at 23,3 h1.25 r270
  text "SYSTEM" at 35.03,2.5 h1.25 r270
  text "MENU" at 59,2.5 h1.25 r270
  text "HMD" at 69.6,-3.825 h1
  text "'.Board_Number'" at 27,-11 h1.2
  text "REV" at 35,-11 h1.2
  text "'.Board_Name'" at 6.025,-11.05 h1.2
  text ".Layer_Name" at -1.894,-69.917 h3.5
Bottom Overlay:
  text ".Layer_Name" at -6.819,-69.842 h3.5
Top Paste:
  text ".Layer_Name" at -1.769,-70.617 h3.5
Bottom Paste:
  text ".Layer_Name" at -5.694,-70.583 h3.5
Top Solder:
  text ".Layer_Name" at -1.878,-70 h3.5
Bottom Solder:
  text ".Layer_Name" at -5.319,-70.117 h3.5
Drill Guide:
  text ".Layer_Name" at 20.581,-25.167 h3.81
Outline:
  the board outline again, w0.05
FAB_DWG:
  drawing of 161 lines, arcs and shapes, not listed
  text "1" at 362.206,379.618 h7.62
  text "6" at -189.126,379.44 h7.62
  text "5" at -78.534,379.364 h7.62
  text "7" at -299.057,379.313 h7.62
  text "4" at 31.067,379.212 h7.62
  text "3" at 141.836,379.212 h7.62
  text "2" at 251.869,379.212 h7.62
  text "REVISIONS" at 316.226,370.63 h2.54
  text "REV" at 233.934,363.63 h2.03
  text "DESCRIPTION" at 288.438,363.63 h2.03
  text "DATE" at 380.122,363.63 h2.03
  text "APRVD" at 405.31,363.63 h2.03
  text "NOTES: UNLESS OTHERWISE SPECIFIED" at -321.977,357.815 h2.03
  text "01" at 234.338,355.63 h2.54
  text "INITIAL RELEASE" at 245.37,355.63 h2.54
  text "07/21/2016" at 374.21,355.63 h2.54
  text "1   DIMENSIONS AND VALUES ARE METRIC." at -325.727,349.815 h2.03
  text "02" at 234.363,348.73 h2.54
  text "ALPHA 2 RELEASE" at 245.395,348.73 h2.54
  text "09/22/2016" at 374.235,348.73 h2.54
  text "2   FABRICATION OF PRINTED CIRCUIT BOARD SHALL BE IN ACCORDANCE WITH" at -325.727,343.815 h2.03
  text "IPC-6011 AND IPC-6012, CLASS 2, AND THE DESIGN INTENT OF IPC-2221 AND" at -325.727,339.815 h2.03
  text "IPC-2222,CLASS 2, AND SHALL MEET THE ACCEPTABILITY REQUIREMENTS OF" at -325.727,335.815 h2.03
  text "IPC-A-600. PRODUCE PCB USING GERBER OR ODB++ FILES PROVIDED." at -325.727,331.815 h2.03
  text "3   FABRICATION VENDOR MUST BE UL APPROVED AND BOARD SHALL BE MARKED WITH" at -325.727,325.815 h2.03
  text "A UL REGISTERED LOGO. MATERIAL MUST MEET UL 94V-0 FLAMMABILITY RATING." at -325.727,321.815 h2.03
  text "4   MATERIAL REQUIREMENTS: MANUFACTURER SHALL SELECT MATERIALS TO ACHIEVE A" at -325.727,315.815 h2.03
  text "BALANCED CONSTRUCTION WITH THE OPTION OF MODIFYING DIELECTRIC THICKNESS" at -325.727,311.815 h2.03
  text "D" at 424.055,309.946 h7.62
  text "D" at -360.627,309.794 h7.62
  text "TO MEET THE REQUIREMENTS SPECIFIED HEREIN." at -325.727,307.815 h2.03
  text "5   BASE MATERIALS: GLASS EPOXY FR4 OR EQUIVALENT PER IPC-4101 MEETING RoHS" at -325.727,301.815 h2.03
  text "REQUIREMENTS FOR PCB FABRICATION AND ASSEMBLY, NOT LESS THAN TG150," at -325.727,297.815 h2.03
  text "A  SEE LAYER DETAIL FOR LAYER STACK UP, ESTIMATED DIELECTRIC THICKNESS," at -325.727,293.815 h2.03
  text "AND COPPER WEIGHT." at -325.727,289.815 h2.03
  text "B  MANUFACTURER SHALL SUBMIT A PROPOSED STACK UP FOR SYNAPSE APPROVAL" at -325.727,285.815 h2.03
  text "IF MODIFICATION IS REQUIRED." at -325.727,281.815 h2.03
  text "C  NO MATERIAL SUBSTITUTIONS WILL BE ALLOWED WITHOUT SYNAPSE APPROVAL." at -325.727,277.815 h2.03
  text "6   PROCESSING ALLOWANCE:" at -325.727,271.815 h2.03
  text "A  LAYER REGISTRATION FROM PRIMARY SIDE TO SECONDARY SIDE SHALL NOT" at -325.727,267.815 h2.03
  text "EXCEED 0.13mm TOTAL." at -325.727,263.815 h2.03
  text "B  MAXIMUM BOW AND TWIST SHALL BE .75% PER IPC-TM-650." at -325.727,259.815 h2.03
  text "7   VIAS" at -325.727,253.815 h2.03
  text "A  VIAS WITH A FINISHED HOLE SIZE OF 0.25mm OR SMALLER DO NOT REQUIRE" at -325.727,249.815 h2.03
  text "A MINIMUM HOLE SIZE AND MAY BE PLATED SHUT OR FILLED WITH SOLDER" at -325.727,245.815 h2.03
  text "MASK. MINIMUM SOLDER PLATING MUST BE MAINTAINED." at -325.727,241.815 h2.03
  text "B  ALL 0.2MM VIA-IN-PADS TO BE FILLED WITH NON-CONDUCTIVE EXPOXY AND COPLANAR." at -325.727,237.815 h2.03
  text "8   CONDUCTORS:  COPPER FOIL SHALL BE IN ACCORDANCE WITH IPC-4562/0." at -325.727,231.815 h2.03
  text "A  FINISH. COPPER PLATE THICKNESS ON SURFACE COPPER AND PLATED" at -325.727,227.815 h2.03
  text "THROUGH HOLES TO BE 0.025mm MINIMUM." at -325.727,223.815 h2.03
  text "B  MINIMUM FINISH CONDUCTOR WIDTH IS 0.076mm" at -325.727,219.815 h2.03
  text "C  MINIMUM FINISHED CONDUCTOR SPACING (AIR GAP) INCLUDING PADS, VIAS," at -325.727,215.815 h2.03
  text "SHAPES, ETC. IS 0.076mm." at -325.727,211.815 h2.03
  text "9   FINAL FINISH SHALL BE ELECTROLESS NICKEL / IMMERSION GOLD (ENIG)." at -325.727,205.815 h2.03
  text "FINISH THICKNESS SHALL BE 3 TO 6 um [118 TO 236 MICROINCHES] OF NICKEL" at -325.727,201.815 h2.03
  text "AND 0.04 TO 0.125um [1.5 TO 5 MICROINCHES] OF GOLD." at -325.727,197.815 h2.03
  text "FINISH SHALL BE RoHS COMPLIANT AND MEET REQUIREMENTS OF IPC-4552." at -325.727,193.815 h2.03
  text "10  FILLETING IS NOT PERMITTED WITHOUT PRIOR SYNAPSE APPROVAL." at -325.727,187.815 h2.03
  text "C" at 424.055,184.495 h7.62
  text "C" at -360.754,184.292 h7.62
  text "11  SOLDER MASK AND COATING:  APPLY SOLDER MASK TO PRIMARY AND SECONDARY" at -325.727,181.815 h2.03
  text "SIDES OF PRINTED WIRING BOARD USING SUPPLIED GERBER FILES IN ACCORDANCE" at -325.727,177.815 h2.03
  text "WITH IPC-SM-840, THICKNESS BETWEEN 0.02 - 0.04mm, COLOR GREEN," at -325.727,173.815 h2.03
  text "CLASS 2." at -325.727,169.815 h2.03
  text "12  OVERALL BOARD THICKNESS SHALL BE MEASURED OVER FINAL FINISH INCLUDING" at -325.727,163.815 h2.03
  text "SOLDER MASK." at -325.727,159.815 h2.03
  text "13  SILKSCREEN:  APPLY SILKSCREEN (LEGEND) TO PRIMARY AND SECONDARY SIDES" at -325.727,153.815 h2.03
  text "OF PRINTED CIRCUIT BOARD. USE PERMANENT INK, NON-NUTRIENT, NON-" at -325.727,149.815 h2.03
  text "CONDUCTIVE POLYMER, COLOR WHITE, PER IPC-4781, TYPE 2. RELIEVE LEGEND" at -325.727,145.815 h2.03
  text "FROM ALL EXPOSED LANDS AND HOLES AS REQUIRED." at -325.727,141.815 h2.03
  text "14  ANY ALTERATIONS TO THE PROVIDED GERBER ARTWORK FILES MUST BE SUBMITTED" at -325.727,135.815 h2.03
  text "TO SYNAPSE FOR APPROVAL." at -325.727,131.815 h2.03
  text "15  IMPEDANCE REQUIREMENTS: LAYERS AND SIGNALS WITH CONTROLLED IMPEDANCES" at -325.869,126.133 h2.03
  text "ARE DETAILED IN THE CONTROLLED IMPEDANCE CHART. MANUFACTURER HAS THE" at -325.727,121.815 h2.03
  text "OPTION OF ADJUSTING THE DIELECTRIC THICKNESS AND TRACE WIDTHS AS" at -325.727,117.565 h2.03
  text "REQUIRED TO MEET THE SPECIFICATIONS CONTAINED IN THIS DRAWING." at -325.727,113.565 h2.03
  text "A  IMPEDANCE TOLERANCES ARE +/-10%." at -325.727,108.565 h2.03
  text "B  ANY ADJUSTMENTS TO DIELECTRIC THICKNESS OR TRACE WIDTHS MUST BE" at -325.727,103.815 h2.03
  text "APPROVED BY SYNAPSE." at -325.727,100.065 h2.03
  text "C  IMPEDANCE TEST RESULTS AND TEST COUPONS FROM EACH LOT SHALL BE" at -325.727,95.565 h2.03
  text "PROVIDED TO SYNAPSE." at -325.727,91.758 h2.03
  text "16  MARK MANUFACTURER NAME, INITIALS, OR LOGO, LOT NUMBER, DATE CODE," at -325.727,86.315 h2.03
  text "UL RECOGNITION MARK AND FLAME RATING IN ETCH OR SILKSCREEN." at -325.727,82.315 h2.03
  text "17  PANELIZATION: COORDINATE WITH SYNAPSE OR THE SYNAPSE SPECIFIED" at -325.727,76.565 h2.03
  text "ASSEMBLY VENDOR FOR PANEL SIZE AND CONFIGURATION. IF BOARDS ARE" at -325.727,72.565 h2.03
  text "NOT TO BE COMPLETELY ROUTED OUT, TRIM PANELIZATION TABS TO LESS" at -325.727,68.565 h2.03
  text "THAN 0.1mm UPON DE-PANELIZATION. AVOID PANELIZATION TABS IN AREAS" at -325.727,64.565 h2.03
  text "INDICATED ON THIS DRAWING." at -325.727,60.565 h2.03
  text "B" at -360.525,58.892 h7.62
  text "B" at 424.182,58.892 h7.62
  text "18  BOARD MUST BE ELECTRICALLY TESTED USING SUPPLIED IPC-356 NETLIST." at -325.727,55.565 h2.03
  text "PRIMARY SIDE" at -262.96,26.483 h2.29
  text "SILKSCREEN" at -232.468,21.483 h2.29
  text "SOLDERMASK" at -232.468,15.983 h2.29
  text "1.50 +/-0.15" at -333.96,9.483 h2.29
  text "1 OZ CU" at -284.292,8.983 h2.29
  text "LAYER 1" at -232.468,8.483 h2.29
  text "FINISHED" at -330.296,4.483 h2.29
  text "DIELECTRIC" at -289.788,4.483 h2.29
  text "1 OZ CU" at -284.292,-0.017 h2.29
  text "LAYER 2" at -232.468,-0.017 h2.29
  text "THICKNESS" at -331.712,-0.517 h2.29
  text "SOLDERMASK" at -232.468,-7.517 h2.29
  text "SILKSCREEN" at -232.468,-13.517 h2.29
  text "SECONDARY SIDE" at -264.792,-18.017 h2.29
  text "LAYER DETAIL" at -276.352,-31.012 h5.08
  text "DIMENSIONS ARE FOR REFERENCE ONLY," at 0.3,-34 h2.29
  text "SCALE:NONE" at -262.628,-38.017 h2.29
  text "USE BOARD OUTLINE FOR DIMENSIONAL DATA." at -4.29,-38.79 h2.29
  text "A" at 423.928,-66.863 h7.62
  text "A" at -360.779,-66.99 h7.62
  text "APPROVALS" at 216.062,-70.37 h2.03
  text "DATE" at 259.122,-70.37 h2.03
  text "UNLESS OTHERWISE" at 160.114,-72.37 h2.54
  text "DESIGNER" at 199.37,-76.37 h2.03
  text "SPECIFIED" at 167.226,-77.37 h2.54
  text "DIMENSIONS ARE" at 162.146,-82.37 h2.54
  text "F. PRICE" at 203.37,-82.37 h2.54
  text "09/22/2016" at 253.21,-82.37 h2.54
  text "1511 Sixth Ave. Suite 300, Seattle, WA 98101 206.381.0898" at 290.458,-83.37 h2.54
  text "IN MILLIMETERS" at 162.146,-87.37 h2.54
  text "ENGINEER" at 199.37,-89.37 h2.03
  text "PRINTED CIRCUIT BOARD" at 316.866,-91.87 h3.81
  text "PROPRIETARY" at 111.606,-92.37 h3.81
  text "D. BRUEY" at 203.37,-95.37 h2.54
  text "TOLERANCES:" at 166.194,-97.37 h2.54
  text "AND" at 123.798,-98.37 h3.81
  text ".Board_Name" at 310.806,-100.117 h5.08
  text "MECH ENG" at 199.37,-102.37 h2.03
  text ".XX" at 164.874,-104.37 h2.29
  text "0.25" at 178.37,-104.37 h2.29
  text "CONFIDENTIAL" at 110.082,-104.87 h3.81
  text "SIZE" at 282.522,-106.37 h1.78
  text "DWG NO" at 293.37,-106.37 h1.78
  text "REV" at 401.234,-106.37 h1.78
  text "A. DAHLGREN" at 203.37,-108.37 h2.54
  text "THE INFORMATION CONTAINED IN" at 112.096,-109.12 h1.52
  text ".XXX" at 163.042,-111.37 h2.29
  text "0.127" at 178.37,-111.37 h2.29
  text "THIS DRAWING IS PROPRIETARY AND" at 110.272,-111.87 h1.52
  text "RESTRICTED. ANY REPRODUCTION" at 112.096,-114.62 h1.52
  text "601-" at 310.425,-116.071 h7.62
  text ".Board_Number" at 338.825,-116.171 h7.62
  text "D" at 282.322,-116.37 h7.62
  text ".PCB_Revision" at 396.766,-116.878 h7.62
  text "IN PART OR WHOLE WITHOUT THE" at 112.096,-117.37 h1.52
  text "ANGLES" at 165.378,-118.37 h2.29
  text "5" at 184.37,-118.37 h2.29
  text "EXPRESS WRITTEN PERMISSION" at 113.062,-120.12 h1.52
  text "OF THE OWNER IS PROHIBITED" at 113.062,-122.87 h1.52
  text "SCALE:NONE" at 283.25,-123.37 h1.78
  text "SHEET 1 OF 1" at 394.826,-123.37 h1.78
  text "1" at 362.41,-135.418 h7.62
  text "6" at -189.05,-135.57 h7.62
  text "5" at -78.611,-135.57 h7.62
  text "4" at 30.838,-135.849 h7.62
  text "3" at 141.658,-135.875 h7.62
  text "2" at 252.097,-135.875 h7.62
  text "7" at -299.159,-136.434 h7.62
ASY_DWG:
  circle w0.38: c188.113,-115.822 r0.829
  lines w0.3: 198.37,-125.37 198.37,-65.37 ; 198.37,-111.37 278.37,-111.37 ; 198.37,-98.37 278.37,-98.37 ; 198.37,-85.37 278.37,-85.37 419.37,-85.37 ; 198.37,-72.37 278.37,-72.37 ; 229.37,346.63 419.37,346.63 ; 229.695,353.722 229.37,353.63 419.37,353.63 ; 229.695,368.722 229.37,368.63 419.37,368.63 ; 243.37,339.63 243.37,368.63 ; 248.37,-125.37 248.37,-65.37 ; 278.37,-125.37 278.37,-65.37 ; 278.37,-119.37 419.37,-119.37 ; 278.37,-103.37 418.37,-103.37 ; 291.37,-119.37 291.37,-103.37 ; 368.37,339.63 368.37,368.63 ; 387.37,-119.37 387.37,-103.37 ; 399.37,339.63 399.37,368.63
  lines w0.38: 173.37,-111.37 175.37,-111.37 ; 173.37,-109.37 175.37,-109.37 ; 173.37,-104.37 175.37,-104.37 ; 173.37,-102.37 175.37,-102.37 ; 174.37,-110.37 174.37,-108.37 ; 174.37,-103.37 174.37,-101.37 ; 179.37,-118.37 181.37,-118.37 ; 179.37,-116.37 181.37,-116.37 ; 180.37,-117.37 180.37,-115.37
  lines w0.508: 199.392,375.834 199.392,388.788 ; 199.392,375.834 199.392,388.788 ; 199.392,375.834 199.392,388.788 ; -371.219,-0.721 -351.915,-0.721 -371.219,-0.721 ; -371.219,-0.264 -351.915,-0.264 -371.219,-0.264 ; -371.219,124.678 -351.915,124.678 -371.219,124.678 ; -371.219,125.136 -351.915,125.136 -371.219,125.136 ; -371.219,250.078 -351.915,250.078 -371.219,250.078 ; -371.219,250.535 -351.915,250.535 -371.219,250.535 ; -241.983,-138.821 -241.983,-125.867 -241.983,-138.821 ; -241.983,375.834 -241.983,388.788 -241.983,375.834 ; -241.526,-138.821 -241.526,-125.867 -241.526,-138.821 ; -241.526,375.834 -241.526,388.788 -241.526,375.834 ; -131.773,-138.821 -131.773,-125.867 -131.773,-138.821 ; -131.773,375.834 -131.773,388.788 -131.773,375.834 ; -131.316,-138.821 -131.316,-125.867 -131.316,-138.821 ; -131.316,375.834 -131.316,388.788 -131.316,375.834 ; -21.537,-138.821 -21.537,-125.867 -21.537,-138.821 ; -21.537,375.834 -21.537,388.788 -21.537,375.834 ; -21.08,-138.821 -21.08,-125.867 -21.08,-138.821 ; -21.08,375.834 -21.08,388.788 -21.08,375.834 ; 88.725,375.834 88.725,388.788 88.725,375.834 ; 89.182,375.834 89.182,388.788 89.182,375.834 ; 198.935,375.834 198.935,388.788 198.935,375.834 ; 309.146,376.088 309.146,388.788 309.146,376.088 ; 309.171,-138.821 309.171,-125.867 309.171,-138.821 ; 309.603,375.834 309.603,388.788 309.603,375.834 ; 309.628,-138.821 309.628,-125.867 309.628,-138.821 ; 419.61,-0.721 438.914,-0.721 419.61,-0.721 ; 419.61,-0.264 438.914,-0.264 419.61,-0.264 ; 419.61,124.704 438.914,124.704 419.61,124.704 ; 419.61,125.161 438.914,125.161 419.61,125.161 ; 419.61,250.129 438.914,250.129 419.61,250.129 ; 419.61,250.586 438.914,250.586 419.61,250.586
  lines w1: -351.63,-125.37 419.37,-125.37 419.37,375.63 -351.63,375.63 -351.63,-125.37
  lines w1.1: 89.37,-138.37 89.37,-125.37 ; 103.37,-125.37 103.37,-85.37 154.37,-85.37 ; 154.37,-125.37 154.37,-85.37 ; 198.37,-138.37 198.37,-125.37 ; 229.37,339.63 229.37,375.63 ; 229.37,360.63 419.37,360.63 ; 278.37,-65.37 154.37,-65.37 154.37,-85.37
  text "1" at 362.206,379.618 h7.62
  text "6" at -189.126,379.44 h7.62
  text "5" at -78.534,379.364 h7.62
  text "7" at -299.057,379.313 h7.62
  text "4" at 31.067,379.212 h7.62
  text "3" at 141.836,379.212 h7.62
  text "2" at 251.869,379.212 h7.62
  text "REVISIONS" at 316.226,370.63 h2.54
  text "REV" at 233.934,363.63 h2.03
  text "DESCRIPTION" at 288.438,363.63 h2.03
  text "DATE" at 380.122,363.63 h2.03
  text "APRVD" at 405.31,363.63 h2.03
  text "NOTES: UNLESS OTHERWISE SPECIFIED" at -339.505,363.53 h2.03
  text "1   RoHS COMPLIANT ASSEMBLY REQUIRED. ASSEMBLE PER IPC-A-610, CLASS 2," at -339.405,357.03 h2.03
  text "01" at 234.338,355.63 h2.54
  text "INITIAL RELEASE" at 245.37,355.63 h2.54
  text "07/21/2016" at 374.21,355.63 h2.54
  text "2   AQUEOUS BASED CLEANING AFTER SOLDER FOR ALL COMPONENTS IS PREFERRED, NO-CLEAN" at -339.311,351.825 h2.03
  text "02" at 234.363,348.73 h2.54
  text "ALPHA 2 RELEASE" at 245.395,348.73 h2.54
  text "09/22/2016" at 374.235,348.73 h2.54
  text "RoHS SOLDER PROCESS IS ACCEPTABLE." at -339.455,347.68 h2.03
  text "3   ITEM IDENTIFICATION: MARK REVISION NUMBER OF THIS DRAWING IN THE SPACE PROVIDED." at -339.63,341.88 h2.03
  text "D" at 424.055,309.946 h7.62
  text "D" at -360.627,309.794 h7.62
  text "C" at 424.055,184.495 h7.62
  text "C" at -360.754,184.292 h7.62
  text "B" at -360.525,58.892 h7.62
  text "B" at 424.182,58.892 h7.62
  text "ASSEMBLY TOP" at 12.054,-25.345 h3.81
  text "A" at 423.928,-66.863 h7.62
  text "A" at -360.779,-66.99 h7.62
  text "APPROVALS" at 216.062,-70.37 h2.03
  text "DATE" at 259.122,-70.37 h2.03
  text "UNLESS OTHERWISE" at 160.114,-72.37 h2.54
  text "DESIGNER" at 199.37,-76.37 h2.03
  text "SPECIFIED" at 167.226,-77.37 h2.54
  text "DIMENSIONS ARE" at 162.146,-82.37 h2.54
  text "F. PRICE" at 203.37,-82.37 h2.54
  text "09/22/2016" at 253.21,-82.37 h2.54
  text "1511 Sixth Ave. Suite 300, Seattle, WA 98101 206.381.0898" at 290.458,-83.37 h2.54
  text "IN MILLIMETERS" at 162.146,-87.37 h2.54
  text "ENGINEER" at 199.37,-89.37 h2.03
  text "PRINTED CIRCUIT BOARD ASSEMBLY" at 303.15,-91.87 h3.81
  text "PROPRIETARY" at 111.606,-92.37 h3.81
  text "D. BRUEY" at 203.37,-95.37 h2.54
  text "TOLERANCES:" at 166.194,-97.37 h2.54
  text "AND" at 123.798,-98.37 h3.81
  text ".Board_Name" at 310.806,-100.117 h5.08
  text "MECH ENG" at 199.37,-102.37 h2.03
  text ".XX" at 164.874,-104.37 h2.29
  text "0.25" at 178.37,-104.37 h2.29
  text "CONFIDENTIAL" at 110.082,-104.87 h3.81
  text "SIZE" at 282.522,-106.37 h1.78
  text "DWG NO" at 293.37,-106.37 h1.78
  text "REV" at 401.234,-106.37 h1.78
  text "A. DAHLGREN" at 203.37,-108.37 h2.54
  text "THE INFORMATION CONTAINED IN" at 112.096,-109.12 h1.52
  text ".XXX" at 163.042,-111.37 h2.29
  text "0.127" at 178.37,-111.37 h2.29
  text "THIS DRAWING IS PROPRIETARY AND" at 110.272,-111.87 h1.52
  text "RESTRICTED. ANY REPRODUCTION" at 112.096,-114.62 h1.52
  text "600-" at 309.125,-116.071 h7.62
  text ".Board_Number" at 338.825,-116.171 h7.62
  text "D" at 282.322,-116.37 h7.62
  text ".PCB_Revision" at 396.766,-116.878 h7.62
  text "IN PART OR WHOLE WITHOUT THE" at 112.096,-117.37 h1.52
  text "ANGLES" at 165.378,-118.37 h2.29
  text "5" at 184.37,-118.37 h2.29
  text "EXPRESS WRITTEN PERMISSION" at 113.062,-120.12 h1.52
  text "OF THE OWNER IS PROHIBITED" at 113.062,-122.87 h1.52
  text "SCALE:4:1" at 283.962,-123.37 h1.78
  text "SHEET 1 OF 2" at 394.826,-123.37 h1.78
  text "1" at 362.41,-135.418 h7.62
  text "6" at -189.05,-135.57 h7.62
  text "5" at -78.611,-135.57 h7.62
  text "4" at 30.838,-135.849 h7.62
  text "3" at 141.658,-135.875 h7.62
  text "2" at 252.097,-135.875 h7.62
  text "7" at -299.159,-136.434 h7.62